# Altium PCB uz_per_thermocoupler_connector.PcbDoc
Units mm, origin at the board's own origin, x right, y up, seen from the top; angles counter-clockwise.
Board outline 160 x 100 mm, 2 copper layers (Top Layer, Bottom Layer); 26 components, 18 nets, 66 pads, 0 vias.
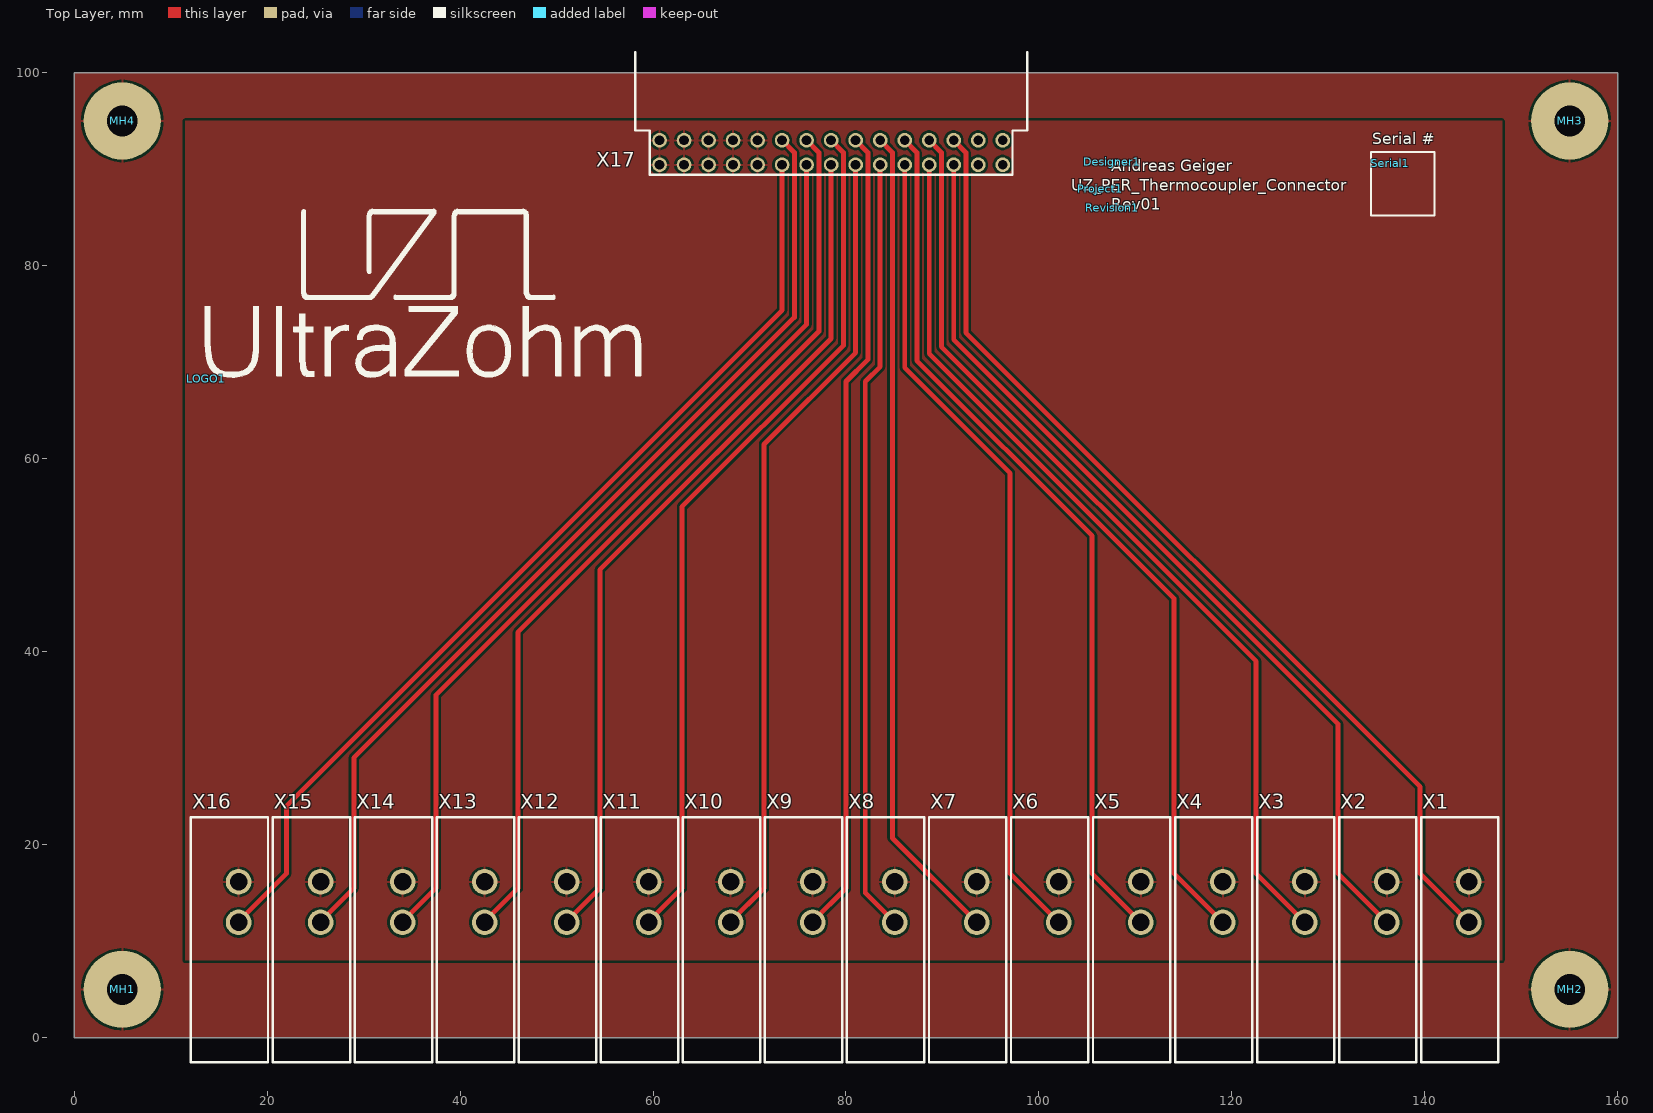
[diagram p0: Top Layer view]
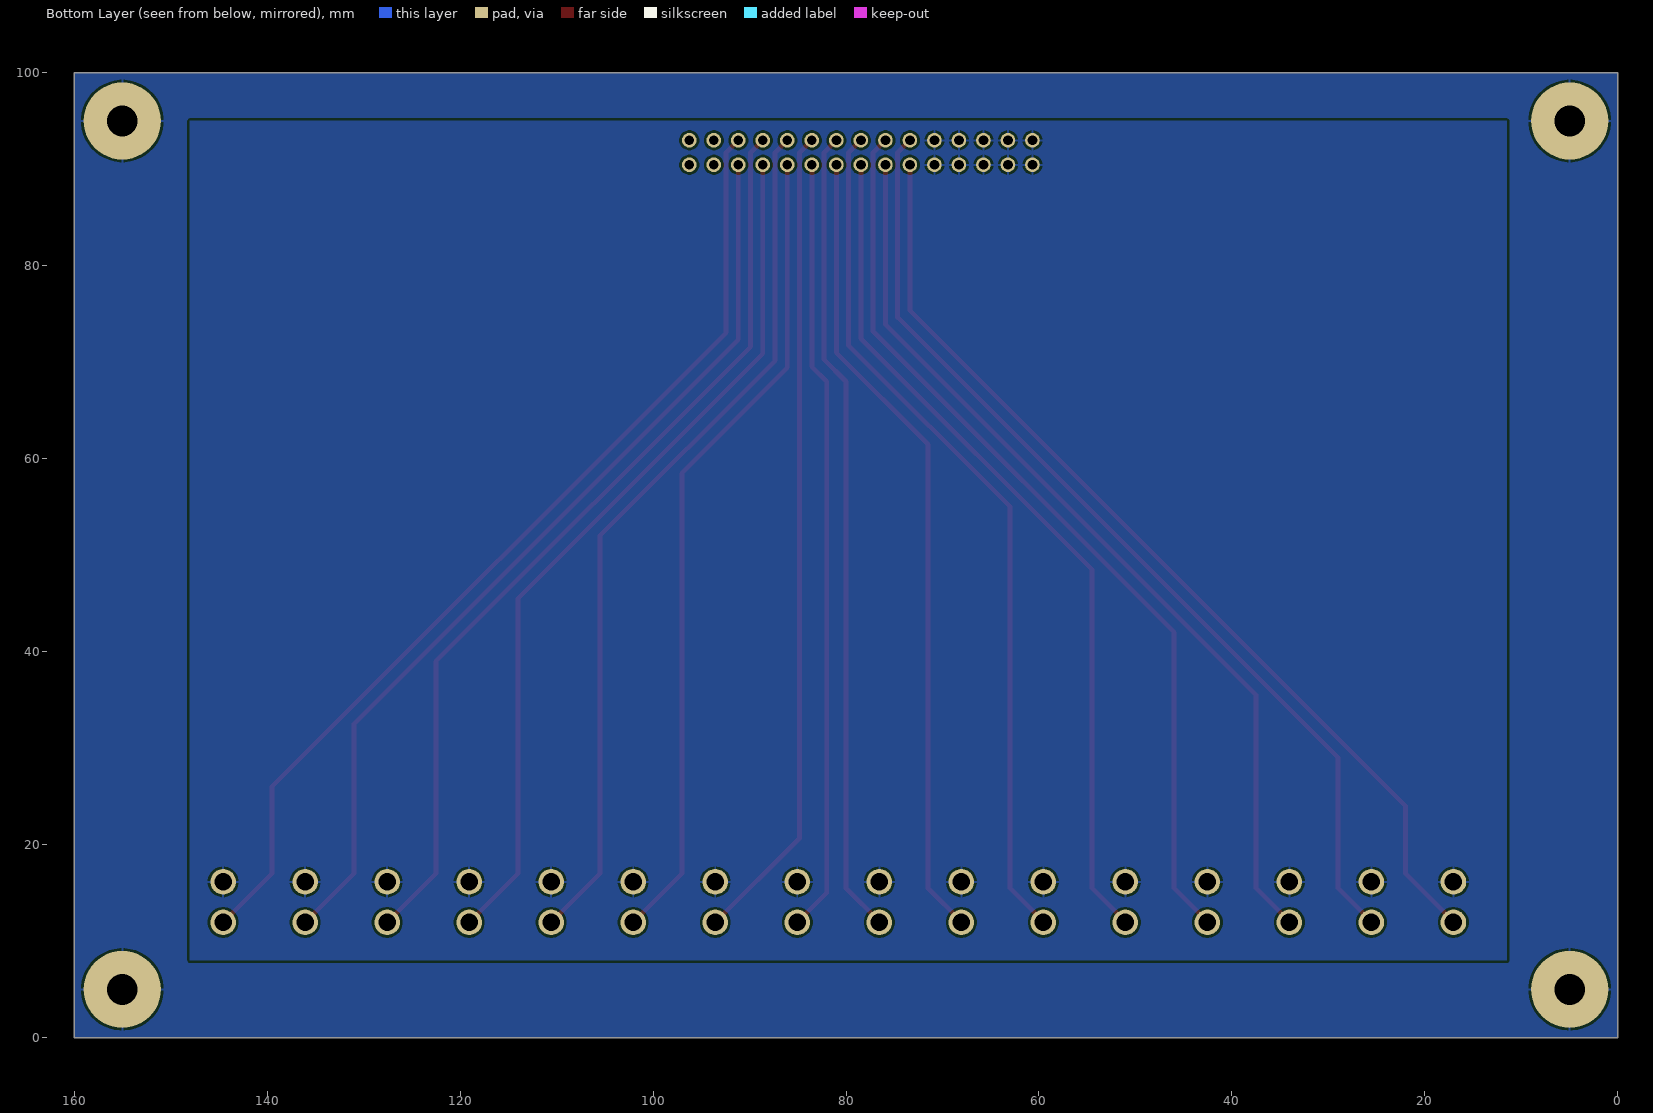
[diagram p1: Bottom Layer view, seen from below]
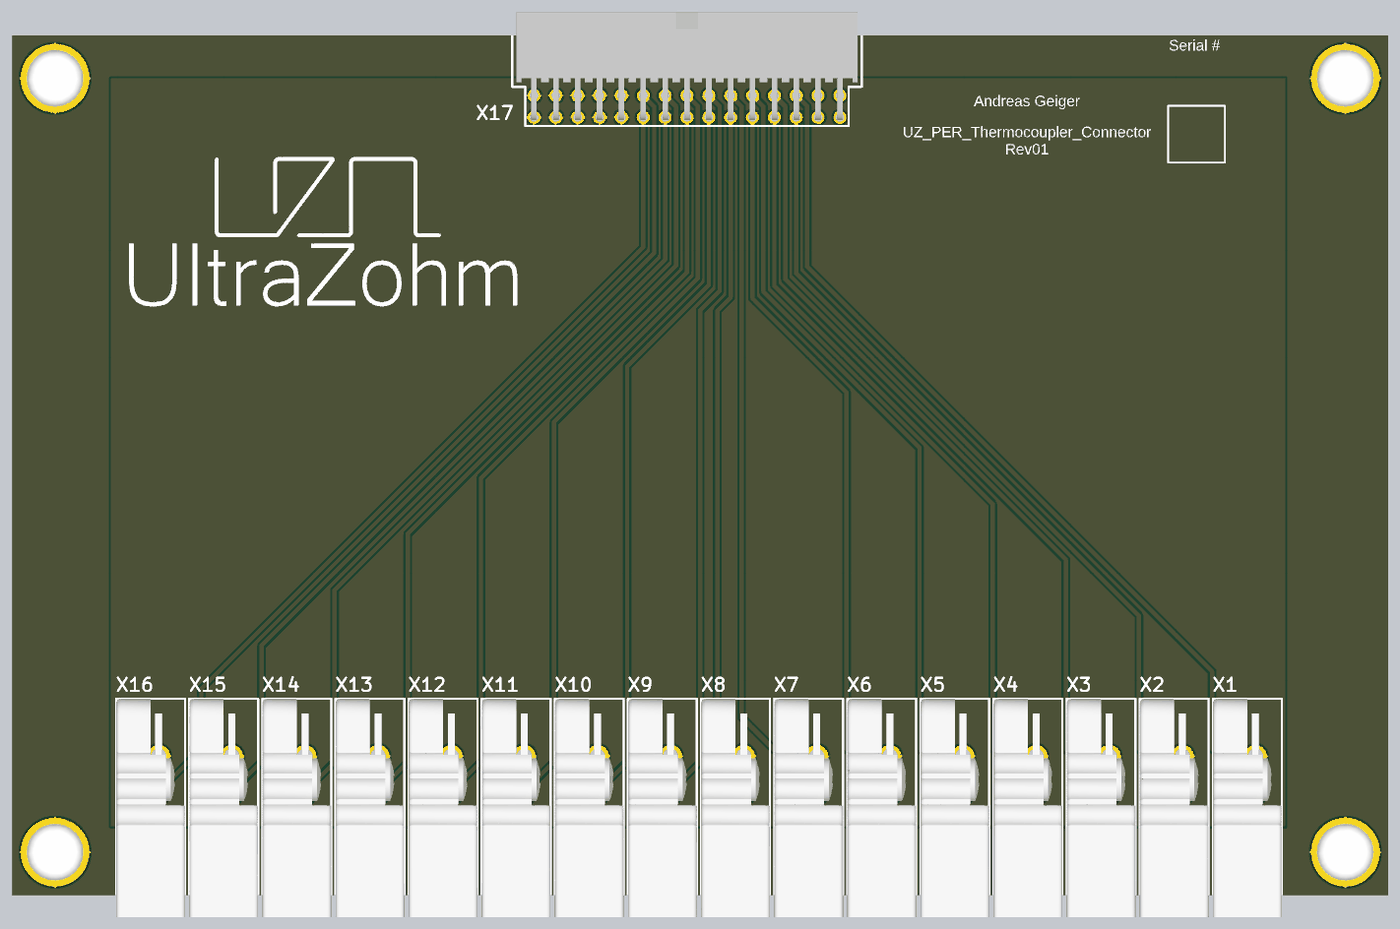
[diagram p2: 3D render of the assembled board from above, using the file's embedded part models]

## Layer stack, top to bottom
Top Solder: solder mask 0.0102, Solder Resist, Dk 3.5
Top Layer: signal copper 0.0356
Dielectric 1: dielectric 0.32, FR-4, Dk 4.8
Bottom Layer: signal copper 0.0356
Bottom Solder: solder mask 0.0102, Solder Resist, Dk 3.5

## Board outline
0,0 160,0 160,100 0,100

## Design rules (kind name [scope] priority, off if disabled: settings)
Clearance [All] p1: gap=0.254 ignorepadtopadclearanceinfootprint=FALSE except(0: Arc-Hole Track-Hole SMDPad-Hole THPad-Hole Via-Hole Fill-Hole Poly-Hole Region-Hole Text-Hole)
ComponentClearance [All] p1: gap=0.1 collisioncheckmode=3 verticalgap=0.1 showdistances=FALSE
PolygonConnect [All] p1: connectstyle=Relief reliefconductorwidth=0.254 reliefentries=4 polygonreliefangle="90 Angle" airgapwidth=0.254
RoutingVias [All] p1: holewidth=0.711 width=1.27 viastyle="Through Hole" minholewidth=0.711 minwidth=1.27 maxholewidth=0.711 maxwidth=1.27
SolderMaskExpansion [All] p1: expansion=0.102 istentingtop=FALSE
Width [All] p1: maxlimit=1 minlimit=0.254 preferedwidth=0.254
29 further rules are at their usual default settings.

## Components (designator, comment, footprint, x,y, rotation, side; value= is the part's Value field where it differs from the comment)
Designer1 "Andreas Geiger" Designator:comment 107.6,90.8 r0 top
LOGO1 "UZ Logo" UZ_Logo_medium 13.7,68.3 r0 top
MH1 "Mouting Hole, 3mm" "NY PMS 440 0025 PH" 5,5 r0 top
MH2 "Mouting Hole, 3mm" "NY PMS 440 0025 PH" 155,5 r0 top
MH3 "Mouting Hole, 3mm" "NY PMS 440 0025 PH" 155,95 r0 top
MH4 "Mouting Hole, 3mm" "NY PMS 440 0025 PH" 5,95 r0 top
Project1 "UZ_PER_Thermocoupler_Connector" COMMENT 106.33,88 r0 top value=UZ_ThermoCouCon
Revision1 "Rev01" Designator:comment 107.6,86 r0 top
Serial1 "Serial #" SERIAL 136.4,90.6 r0 top
X1 "CMJ-XXPS" CMJ-XXPS 144.5,12 r90 top
X2 "CMJ-XXPS" CMJ-XXPS 136,12 r90 top
X3 "CMJ-XXPS" CMJ-XXPS 127.5,12 r90 top
X4 "CMJ-XXPS" CMJ-XXPS 119,12 r90 top
X5 "CMJ-XXPS" CMJ-XXPS 110.5,12 r90 top
X6 "CMJ-XXPS" CMJ-XXPS 102,12 r90 top
X7 "CMJ-XXPS" CMJ-XXPS 93.5,12 r90 top
X8 "CMJ-XXPS" CMJ-XXPS 85,12 r90 top
X9 "CMJ-XXPS" CMJ-XXPS 76.5,12 r90 top
X10 "CMJ-XXPS" CMJ-XXPS 68,12 r90 top
X11 "CMJ-XXPS" CMJ-XXPS 59.5,12 r90 top
X12 "CMJ-XXPS" CMJ-XXPS 51,12 r90 top
X13 "CMJ-XXPS" CMJ-XXPS 42.5,12 r90 top
X14 "CMJ-XXPS" CMJ-XXPS 34,12 r90 top
X15 "CMJ-XXPS" CMJ-XXPS 25.5,12 r90 top
X16 "CMJ-XXPS" CMJ-XXPS 17,12 r90 top
X17 "IPL1-115-01-L-D-RA-K" IPL1-115-01-XX-D-RA 78.46,102.652 r0 top

## Footprints (in the part's own frame and the unit in brackets; to place one, negate y for a bottom-side part, rotate by r counter-clockwise, add the part's x,y. Pads: shape width x height; smd on the part's side, far side on the other; paste and mask are expansions set on the pad)
CMJ-XXPS [mm]
  round 2.65 hole 1.8: N(4.15,-0.05) P(-0.05,-0.05)
  silkscreen extent -14.55,-3.1 10.85,4.9, body extent -14.55,-3.1 10.85,4.9, height 16
COMMENT [mm] "prints out the comment of a component"
Designator:comment [mm] "prints out designator and comment of a component"
IPL1-115-01-XX-D-RA [mil]
  round 60 hole 40 mask+3: 1(-700,-380) 2(-600,-380) 3(-500,-380) 4(-400,-380) 5(-300,-380) 6(-200,-380) 7(-100,-380) 8(0,-380) 9(100,-380) 10(200,-380) 11(300,-380) 12(400,-380) 13(500,-380) 14(600,-380) 15(700,-380) 16(-700,-480) 17(-600,-480) 18(-500,-480) 19(-400,-480) 20(-300,-480) 21(-200,-480) 22(-100,-480) 23(0,-480) 24(100,-480) 25(200,-480) 26(300,-480) 27(400,-480) 28(500,-480) 29(600,-480) 30(700,-480)
  silkscreen extent -800,-520 800,-20, body extent -780,-492 780,0, height 315
"NY PMS 440 0025 PH" [mm]
  round 8 hole 3.2: 1(0,0)
  body extent -3.3,-3.3 3.3,3.3, height 2.69
SERIAL [mm]
  silkscreen extent -2,-5.4 4.6,1.2
UZ_Logo_medium [mm] "logo width 4.5cm"
  silkscreen extent -0.1,0.17 45.04,17.54

## Part data
Designer1: library part 4, "Create a project parameter named \"Author\" this is the value of this component. It is printed on the PCB. Once the parameter is updated (e.g. new revision) it gets updated on the PCB as well", Manufacturer="PCB Manufacturer", Manufacturer Part Number="Project Author", Component Type="Project Author", Created from="T. Wendt", Created On="01.03.2021 08:53:41", Last Updated="01.03.2021 09:20:27", Live Cycle Status=1, PartID=4, Type="Standard (No BOM)"
LOGO1: library part 1, "Official Project Logo of the UltraZohm", Manufacturer="PCB Manufacturer", Manufacturer Part Number="UltraZohm Logo", Component Type=Logo, ComponentLink1Description=Homepage, ComponentLink1URL=https://ultrazohm.com, Created from="T. Wendt", Created On="19.02.2021 16:55:56", Last Updated="02.03.2021 14:31:24", Live Cycle Status=1, PartID=1, Type="Standard (No BOM)"
MH1 MH2 MH3 MH4: library part "NY PMS 440 0025 PH", "Machine Screw, Round, #4-40 x 1/4, Nylon, Philips panhead", Package=Screw, Supplier Part Number 1=H542-ND, ComponentLink1Description="Datasheet Link", ComponentLink1URL=http://www.fasnetdirect.com/refguide/Nylpanms.pdf, Created=2021_06_22_AGeiger, MF="B&F Fastener Supply", MPN="NY PMS 440 0025 PH", Supplier 1=Digi-Key
Project1: library part 2, "Create a project parameter named \"ProjectNameCustom\" this is the value of this component and it is printed on the PCB.", Manufacturer="PCB Manufacturer", Manufacturer Part Number="Project Name", Component Type="Project Name", Created from="T. Wendt", Created On="01.03.2021 08:43:57", Last Updated="01.03.2021 09:07:27", Live Cycle Status=1, PartID=2, Type="Standard (No BOM)"
Revision1: library part 3, "Create a project parameter named \"ProjectRevision\" this is the value of this component. It is printed on the PCB. Once the parameter is updated (e.g. new revision) it gets updated on the PCB as well", Manufacturer="PCB Manufacturer", Manufacturer Part Number="Project Revision", Component Type="Project Revision", Created from="T. Wendt", Created On="01.03.2021 08:50:34", Last Updated="01.03.2021 09:28:36", Live Cycle Status=1, PartID=3, Type="Standard (No BOM)"
Serial1: library part 6, "Field to put in a serial number", Manufacturer="PCB Manufacturer", Manufacturer Part Number="Serial Number", Component Type="Serial Number", Created from="T. Wendt", Created On="02.03.2021 14:31:24", Last Updated="02.03.2021 14:31:24", Live Cycle Status=1, PartID=6, Type="Standard (No BOM)"
X1 X2 X3 X4 X5 X6 X7 X8 X9 X10 X11 X12 X13 X14 X15 X16: "Connector Miniature Jack PCB Side Mounting", Manufacturer Part Number=CMJ-XXPS
X17: "Terminal Assembly, Double Row, Right Angle, Thru-Hole, 2.54 mm x 2.54 mm Pitch, 30 Pins", Device Package=Connector, Manufacturer=SAMTEC, Component Type="Samtec Connector", ComponentLink1Description=Homepage, ComponentLink1URL=https://www.samtec.com/products/ipl1, Created from=TWendt, Created On="12.02.2021 15:31:18", Last Updated="15.02.2021 10:07:42", Live Cycle Status=1, Manufacturer Part Number=IPL1-115-01-L-D-RA-K, Number of positions=30, Number of rows=2, PartID=34, Stock number="not stored", Supplier 1=SAMTEC, Supplier Part Number 1=IPL1-115-01-L-D-RA-K, Type=Connector

## Nets (pads, with @x,y where several pads share a name; then routed paths per layer and width w, separated by ;. In a path a pad name is that pad's centre, name@x,y a point inside that pad or via, vN(x,y) a via of type N, cw(c..) or ccw(c..) an arc to the next point about the centre after c; other vN are vias at no path point)
CH_5: X1.P X17.13 | length 103.1
  Top Layer w0.5: X17.13 92.426,91.734 92.426,73.074 139.5,26 139.5,17 X1.P@144.5,12
CH_6: X2.P X17.28 | length 97
  Top Layer w0.5: X17.28 91.16,72.34 131,32.5 131,17 X2.P@136,12
CH_7: X3.P X17.12 | length 97.1
  Top Layer w0.5: X17.12 89.886,91.734 89.886,71.614 122.5,39 122.5,17 X3.P@127.5,12
CH_8: X4.P X17.27 | length 91
  Top Layer w0.5: X17.27 88.62,70.88 114,45.5 114,17 X4.P@119,12
CH_9: X5.P X17.11 | length 91.1
  Top Layer w0.5: X17.11 87.346,91.734 87.346,70.154 105.5,52 105.5,17 X5.P@110.5,12
CH_10: X6.P X17.26 | length 85.1
  Top Layer w0.5: X17.26 86.08,69.42 97,58.5 97,17 X6.P@102,12
CH_11: X7.P X17.10 | length 85.1
  Top Layer w0.5: X17.10 84.806,91.734 84.806,20.694 X7.P@93.5,12
CH_12: X8.P X17.25 | length 80.3
  Top Layer w0.5: X17.25 83.54,69.54 82,68 82,15 X8.P@85,12
CH_13: X9.P X17.9 | length 83.9
  Top Layer w0.5: X9.P@76.5,12 80,15.5 80,68 82.266,70.266 82.266,91.734 X17.9
CH_14: X10.P X17.24 | length 83.8
  Top Layer w0.5: X10.P@68,12 71.5,15.5 71.5,61.5 81,71 X17.24
CH_15: X11.P X17.8 | length 89.9
  Top Layer w0.5: X11.P@59.5,12 63,15.5 63,55 79.726,71.726 79.726,91.734 X17.8
CH_16: X12.P X17.23 | length 89.8
  Top Layer w0.5: X12.P@51,12 54.5,15.5 54.5,48.5 78.46,72.46 X17.23
CH_17: X13.P X17.7 | length 95.9
  Top Layer w0.5: X13.P@42.5,12 46,15.5 46,42 77.186,73.186 77.186,91.734 X17.7
CH_18: X14.P X17.22 | length 95.8
  Top Layer w0.5: X14.P@34,12 37.5,15.5 37.5,35.5 75.92,73.92 X17.22
CH_19: X15.P X17.6 | length 101.9
  Top Layer w0.5: X15.P@25.5,12 29,15.5 29,29 74.646,74.646 74.646,91.734 X17.6
CH_20: X16.P X17.21 | length 101.8
  Top Layer w0.5: X16.P@17,12 22,17 22,24 73.38,75.38 X17.21
COM: X1.N X2.N X3.N X4.N X5.N X6.N X7.N X8.N X9.N X10.N X11.N X12.N X13.N X14.N X15.N X16.N X17.1 X17.2 X17.3 X17.4 X17.5 X17.16 X17.17 X17.18 X17.19 X17.20
GND: MH1.1 MH2.1 MH3.1 MH4.1
pads on no net: X17.14 X17.15 X17.29 X17.30

## Polygon pours and split planes (outlines as drawn)
GND on Bottom Layer "GND_Plane_BOT" (solid, remove dead copper, pour order 3): 0,0 160,0 160,100 0,100
COM on Bottom Layer "COM_Plane_BOT" (solid, remove dead copper, pour order 0): 11.5,95 11.5,8 148,8 148,95
GND on Top Layer "GND_Plane_TOP" (solid, remove dead copper, pour order 2): 0,0 160,0 160,100 0,100
COM on Top Layer "COM_Plane_TOP" (solid, remove dead copper, pour order 1): 11.5,95 11.5,8 148,8 148,95

## Silkscreen, mask and mechanical layers (free items; w line width, h text height)
Mechanical 1:
  the board outline again, w0.2